# EAGLE board sha2017_draft_rev1_0_0 (EAGLE 6.6.0)
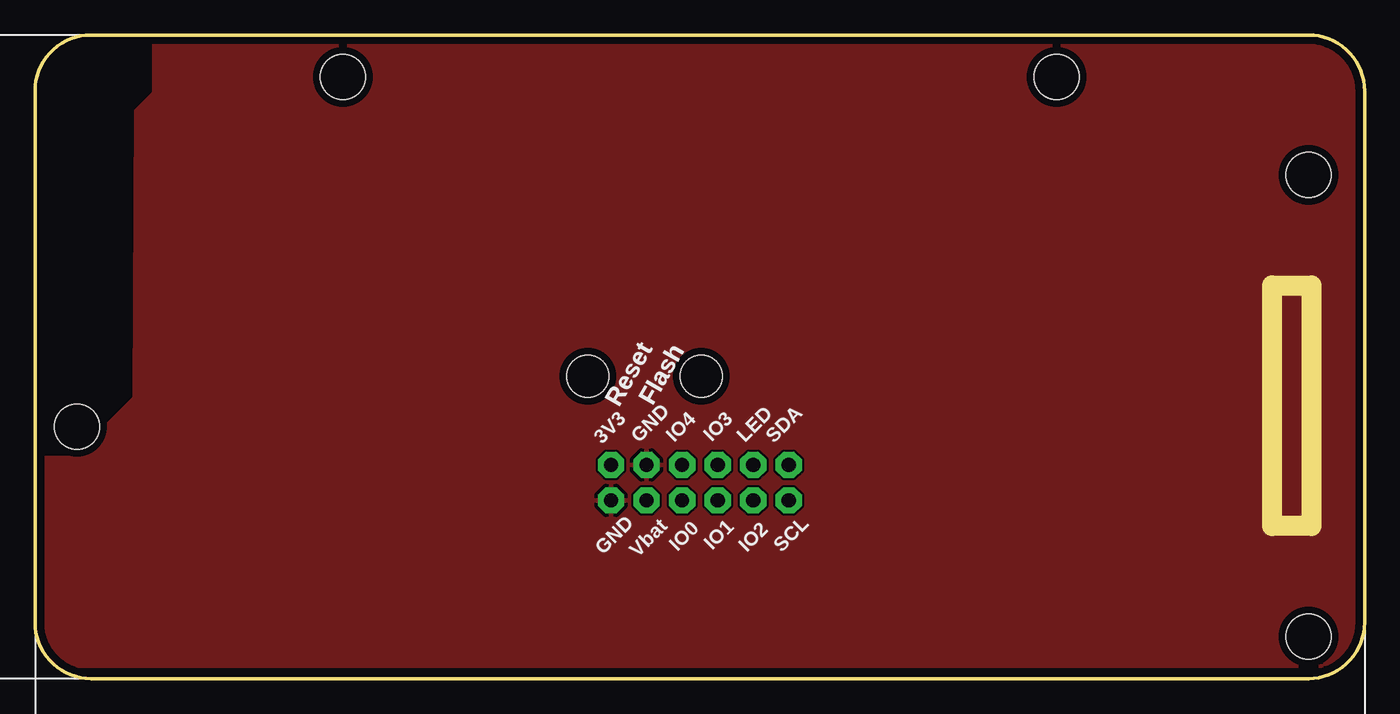
[diagram p0: board, top side]
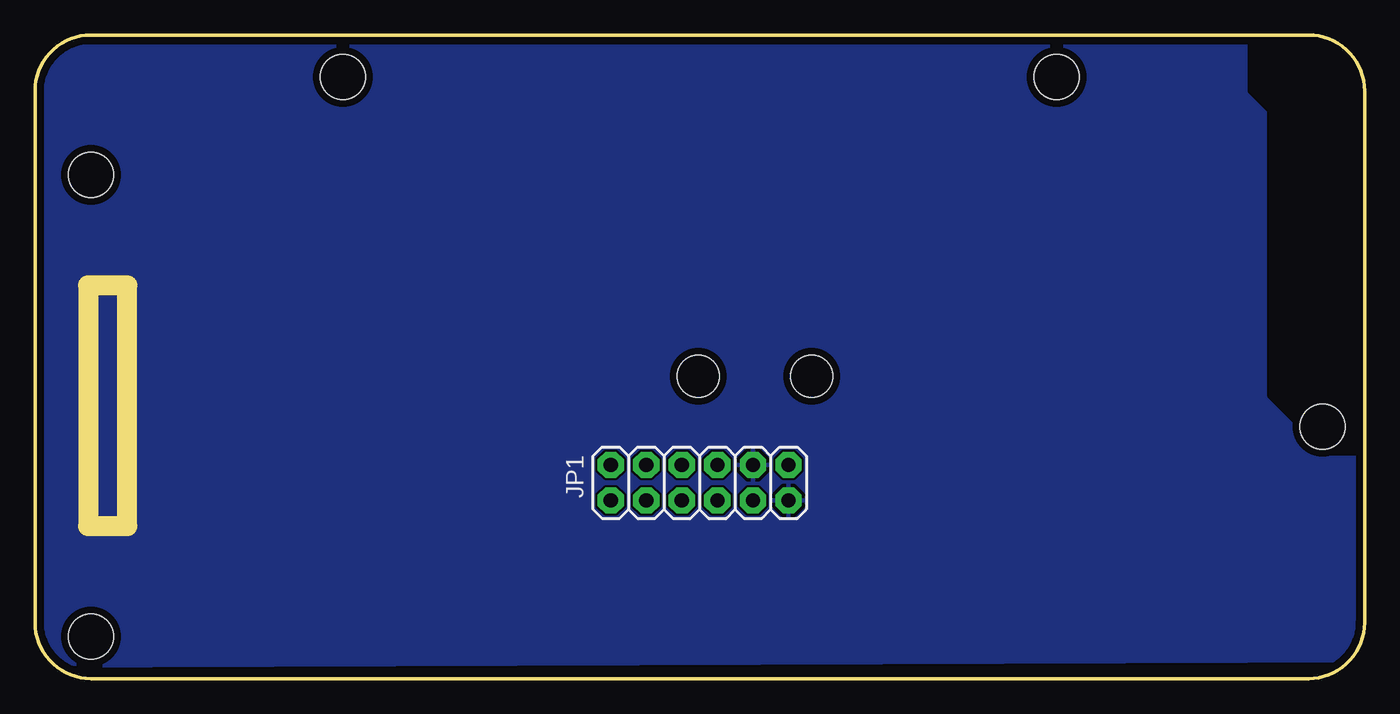
[diagram p1: board, bottom side, seen from below]

Size 95 x 46 mm. Coordinates in mm from the lower left corner, seen from the top.
Outline: 91,46 4,46 arc90 0,42 0,4 arc90 4,0 91,0 arc90 95,4 95,42 arc90 91,46
Copper layers (1*16): Top 0.035mm / dielectric 1.6mm / Bottom 0.035mm
Design rules "Elecrow_2-layer_PCB_eagle_rule": minimum track width 6mil, minimum drill 12mil, track to track 6mil, track to pad 6mil, pad to pad 6mil, via to via 8mil, smd to smd 0mil, copper to edge 20mil, drill to drill 10mil, minimum pad ring 6mil, minimum via ring 6mil, stop-mask expansion 0mil, vias tented up to drill 100mil, thermal gap 10mil
Net classes: 1 FAT: width 0.2 mm, drill 0.4 mm; 2 GND/3V3: width 0.2 mm, drill 0.4 mm; 3 Touch: width 0.2 mm, clearance 1 mm; 4 touch prox: width 0.2 mm, clearance 1.6 mm
Holes 3.2 mm at 3,18 91,3 91,36 22,43 73,43
Holes 3 mm at 39.5,21.6 47.6,21.6 39.51,21.6 47.61,21.6
tRestrict: area -0.3,16.1 to 8.2,46.1
bRestrict: area -0.3,16.1 to 8.2,46.1
Milling: 4 lines

## Footprints (pad centres in the part's own frame; a part is rotated, then mirrored left to right if it is on the bottom)
2X6 = drill 1.016 pad 1.88 octagon: 1 0,0; 2 0,2.54; 3 2.54,0; 4 2.54,2.54; 5 5.08,0; 6 5.08,2.54; 7 7.62,0; 8 7.62,2.54; 9 10.16,0; 10 10.16,2.54; 11 12.7,0; 12 12.7,2.54

## Placement (x,y rotation side)
JP1  2X6 FEMALE  [2X6]  53.86,12.73 0 bottom

## Library data of the parts
JP1 = SparkFun-Connectors; PROD_ID: CONN-12423

## Nets
3V3_SWITCHED: JP1.12
EXTIO-0: JP1.7
EXTIO-1: JP1.5
EXTIO-2: JP1.3
EXTIO-3: JP1.6
EXTIO-4: JP1.8
GND [GND/3V3]: JP1.10 JP1.11
I2C_SCL: JP1.1
I2C_SDA: JP1.2
WS2812_DATA_OUT: JP1.4
WS2812_POWER: JP1.9

## Tracks (layer width: path | path; a pad name or v marks a point on that pad's centre or on a via)
GND
  pour Bottom (rank 6): 95.2,42 95.3,0.9 -0.3,1.3 0.6,43.1 arc-90 3.6,46.1 90.7,46.2 arc-90
  pour Top (rank 6): -0.6,46.4 96.1,46.4 96.1,0.9 -1.1,0.9 -1.1,46.5

## Text on the board
tNames: Reset | Reset | Flash | Flash | 3V3 | GND | IO4 | IO3 | LED | SDA | GND | Vbat | IO0 | IO1 | IO2 | SCL